# Altium PCB chargerShield.PcbDoc
Units mm, origin at the board's own origin, x right, y up, seen from the top; angles counter-clockwise.
Board outline 67.89 x 33.03 mm, 2 copper layers (Top Layer, Bottom Layer); 12 components, 9 nets, 73 pads, 9 vias.
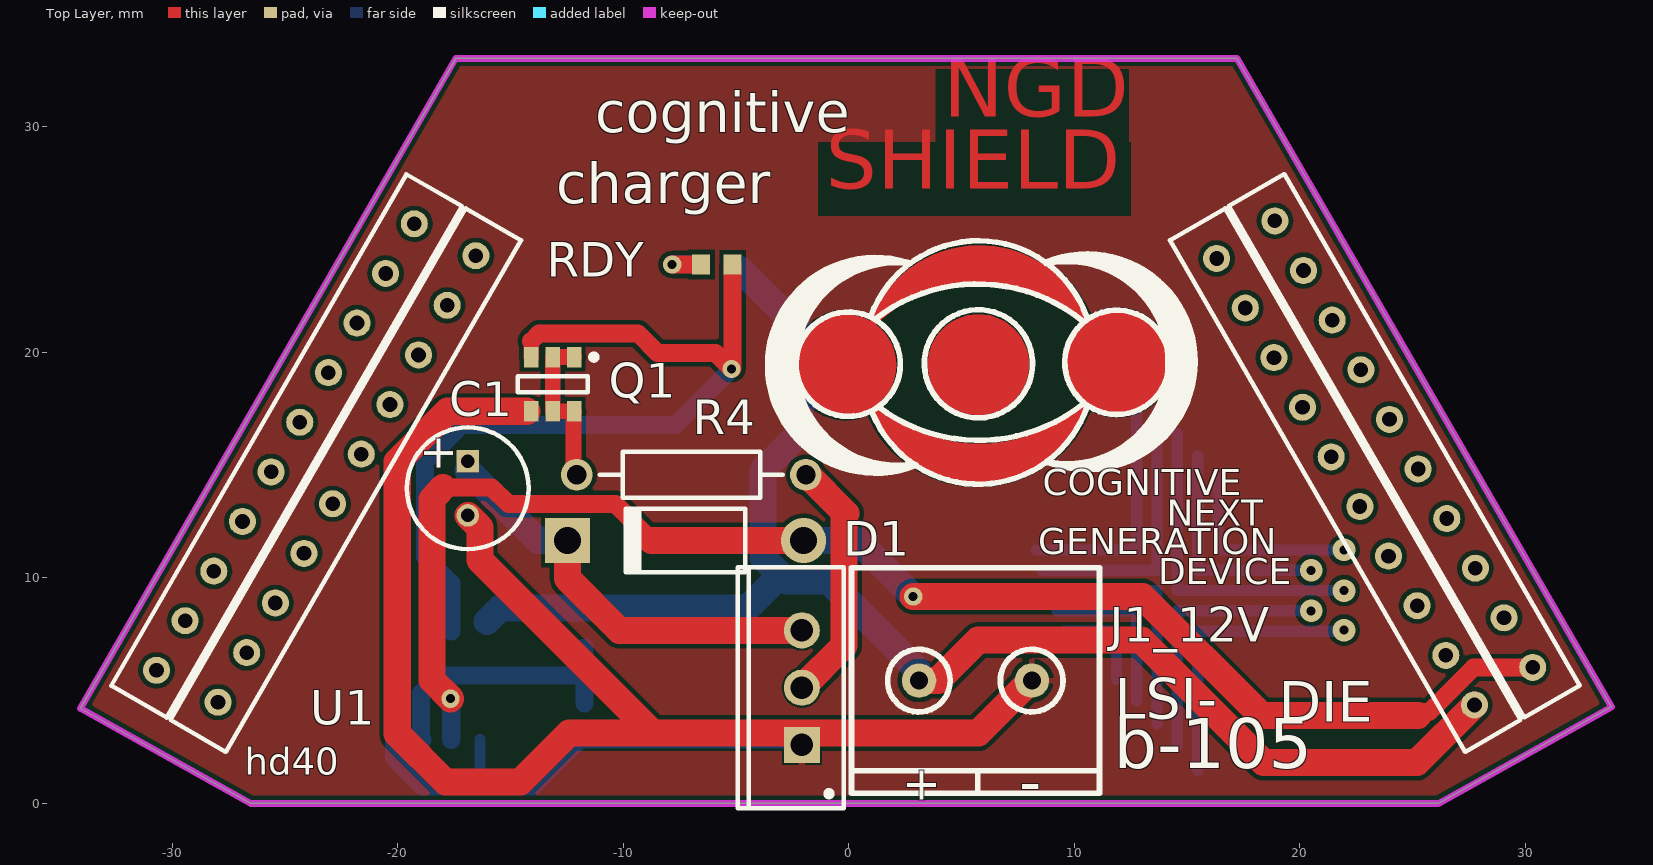
[diagram p0: Top Layer view]
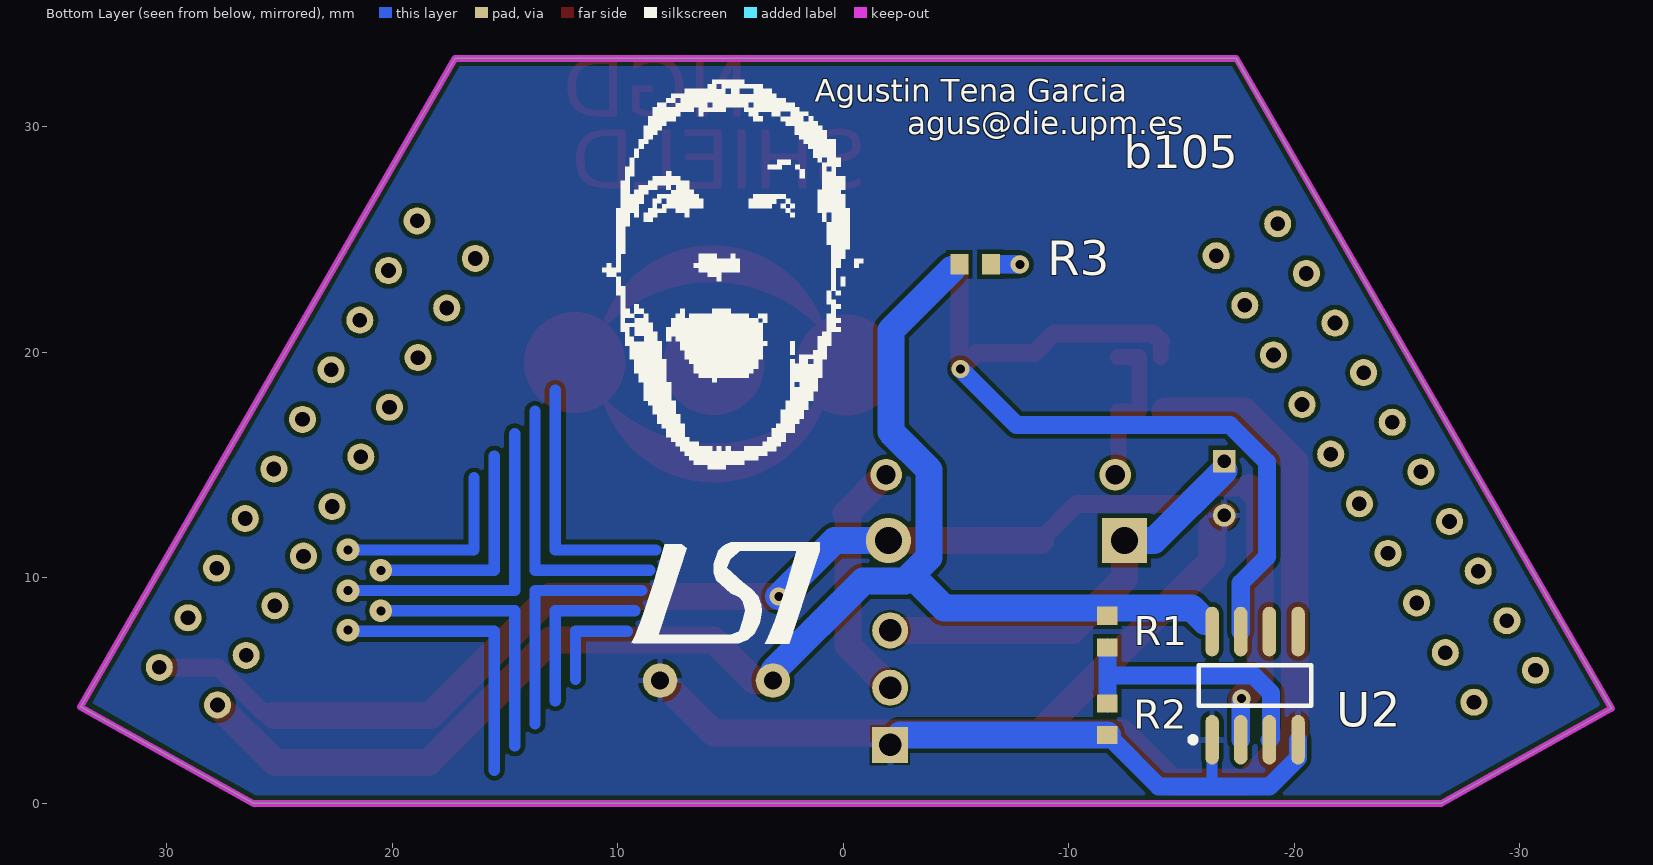
[diagram p1: Bottom Layer view, seen from below]

## Layer stack, top to bottom
Top Layer: signal copper 0.0356
Dielectric: dielectric 0.32, FR-4, Dk 4.8
Bottom Layer: signal copper 0.0356

## Board outline
-26.52,0 26.151,0 33.821,4.281 33.815,4.277 17.213,33.03 -17.427,33.03 -34.067,4.212 -34.056,4.206

## Design rules (kind name [scope] priority, off if disabled: settings)
Clearance pic_clearance [InComponent('U1')] p1: gap=0.1
Clearance [All] p2: gap=0.2
PolygonConnect [All] p1: connectstyle=Relief reliefconductorwidth=0.254 reliefentries=4 polygonreliefangle="90 Angle"
RoomDefinition chargerShield [InComponentClass('chargerShield')] p1 off: confinementstyle=ConfineIn formatcopy=TRUE lockcomponents=FALSE outline -169.867,-198.98 -119.067,-198.98 -119.067,-173.58 -169.867,-173.58
RoutingVias [All] p1: holewidth=0.4 width=0.8 viastyle="Through Hole" minholewidth=0 minwidth=0.6 maxholewidth=1 maxwidth=1.4
SilkscreenOverComponentPads [All] p1: minsilkscreentomaskgap=0.254
SolderMaskExpansion [All] p1: expansion=0.102
Width "VCC 5" [InNet('VCC5.0_POWER')] p1: maxlimit=2 minlimit=0.2 preferedwidth=1.2 minimp=50.000000 maximp=50.000000 favimp=50.000000
Width VCC [InNet('VCC')] p2: maxlimit=2 minlimit=0.2 preferedwidth=1.2
Width GND [InNet('GND')] p3: maxlimit=2 minlimit=0.2 preferedwidth=1.2 minimp=50.000000 maximp=50.000000 favimp=50.000000
Width [All] p4: maxlimit=2 minlimit=0.2 preferedwidth=1.2 minimp=50.000000 maximp=50.000000 favimp=50.000000
27 further rules are at their usual default settings.

## Components (designator, comment, footprint, x,y, rotation, side; value= is the part's Value field where it differs from the comment)
C1 "Cap Pol" Radial_pol_2.7 -16.89,13.97 r90 top
D1 "Diode 1N4007" DIO10.46-5.3X2.8 -7.233,11.654 r180 top
hd40 "header_cognitiveNGD_shield" HEADER_COGNITIVENGD_LONGLEGS -15.437,13.08 r0 top locked
J1_12V "Power 12v" "Conector ED-1631" 10.619,-0.055 r180 top (schematic designator J1)
Q1 "IRF5801" SOT23-6 -13.129,18.586 r270 top
R1 "resistor" 1608[0603] -11.71,7.62 r90 bottom
R2 "resistor" 1608[0603] -11.71,3.73 r90 bottom
R3 "resistor" 1608[0603] -5.847,23.905 r0 bottom
R4 "resistor" AXIAL-0.4 -6.981,14.568 r0 top (schematic designator R5)
RDY "LED_SMD_Hg" "0603[1608] pol" -5.847,23.895 r0 top (schematic designator LED_full)
U1 "LM317AMDT" TO-220AB -2.08,5.13 r90 top
U2 "LM311D" SOIC-8 -18.26,5.22 r90 bottom

## Footprints (in the part's own frame and the unit in brackets; to place one, negate y for a bottom-side part, rotate by r counter-clockwise, add the part's x,y. Pads: shape width x height; smd on the part's side, far side on the other; paste and mask are expansions set on the pad)
"0603[1608] pol" [mm]
  rect 0.8x0.9 smd: 1(-0.7,0) 2(0.7,0)
  body extent -0.8,-0.4 0.8,0.4, height 0.3
1608[0603] [mm] "Chip Capacitor, Body 1.6x0.8mm, IPC High Density"
  rect 0.8x0.9 smd: 1(-0.7,0) 2(0.7,0)
  body extent -0.8,-0.4 0.8,0.4, height 0.3
AXIAL-0.4 [mm] "Axial Device, Thru-Hole; 2 Leads; 0.4 in Pin Spacing"
  round 1.4 hole 0.85: 1(-5.08,0) 2(5.08,0)
  silkscreen extent -4.06,-1.02 4.06,1.02, body extent -5.06,-1.28 5.02,1.26, height 2.54
"Conector ED-1631" [mm]
  round 1.524 hole 0.8: 1(2.5,-5.5) 2(7.5,-5.5)
  silkscreen extent -0.5,-10.5 10.5,-0.5, body extent -0.02,-10.1 9.98,-2.1, height 10
DIO10.46-5.3X2.8 [mm] "Diode, Axial; Body 5.2 x 2.7 mm (LxDia. max), Lead Dia. 0.86 mm (max)"
  round 2 hole 1.2: 1(-5.23,0)
  rect 2x2 hole 1.2: 2(5.23,0)
  silkscreen extent -2.65,-1.4 2.75,1.4, body extent -5.34,-1.02 5.37,1, height 2.21
HEADER_COGNITIVENGD_LONGLEGS [mm]
  round 1.2 / inner oval 2.5x1.2 / far side round 1.2 hole 0.65: 00(-3.826,12.617) 01(-5.096,10.417) 02(-6.366,8.217) 03(-7.636,6.018) 04(-8.906,3.818) 05(-10.176,1.618) 06(-11.446,-0.581) 07(-12.716,-2.781) 08(-13.986,-4.981) 09(-15.256,-7.181) 10(-12.527,-8.594) 11(-11.257,-6.395) 12(-9.987,-4.195) 13(-8.717,-1.995) 14(-7.447,0.204) 15(-6.177,2.404) 16(-4.907,4.604) 17(-3.637,6.804) 18(-2.367,9.003) 19(-1.097,11.203) 20(31.747,11.082) 21(33.017,8.882) 22(34.287,6.682) 23(35.557,4.483) 24(36.827,2.283) 25(38.097,0.083) 26(39.367,-2.116) 27(40.637,-4.316) 28(41.907,-6.516) 29(43.177,-8.716) 30(45.761,-7.051) 31(44.491,-4.851) 32(43.221,-2.651) 33(41.951,-0.452) 34(40.681,1.748) 35(39.411,3.948) 36(38.141,6.148) 37(36.871,8.347) 38(35.601,10.547) 39(34.331,12.747)
  silkscreen extent -17.26,-10.79 47.84,14.82, body extent -16.97,-10.43 47.5,14.46, height 7
Radial_pol_2.7 [mm] "Polarized Capacitor (Radial); 2 Leads"
  rect 1x1 hole 0.6: 1(1.2,0)
  round 1 hole 0.6: 2(-1.2,0)
  silkscreen extent -2.7,-2.7 2.7,2.7, body extent -2.79,-2.54 2.79,2.54, height 12.8
SOIC-8 [mm] "SOIC, 8-Leads, Body 4.9x3.9mm, Pitch 1.27mm, IPC Medium Density"
  oval 2.2x0.6 smd: 1(-2.4,1.905) 2(-2.4,0.635) 3(-2.4,-0.635) 4(-2.4,-1.905) 5(2.4,-1.905) 6(2.4,-0.635) 7(2.4,0.635) 8(2.4,1.905)
  silkscreen extent -2.52,-2.5 0.9,2.88, body extent -3.01,-2.5 3.01,2.5, height 1.75
SOT23-6 [mm] "SOT23, 6-Leads, Body 2.9x1.6mm, Pitch 0.95mm, Lead Span 2.8mm, IPC High Density"
  rect 0.9x0.65 smd: 1(-1.2,0.95) 2(-1.2,0) 3(-1.2,-0.95) 4(1.2,-0.95) 5(1.2,0) 6(1.2,0.95)
  silkscreen extent -1.32,-1.55 0.35,1.95, body extent -1.5,-1.55 1.5,1.55, height 1.45
TO-220AB [mm] "TO, Thru-Hole, Vertical, Heatsink Mounted; 3 In-Line Leads; Pitch 2.54 mm"
  rect 1.6x1.6 hole 1: 1(-2.54,0)
  round 1.6 hole 1: 2(0,0) 3(2.54,0)
  silkscreen extent -5.35,-1.85 5.35,2.85, body extent -5.1,-0.37 5.06,19.13, height 2

## Part data
C1: "Polarized Capacitor (Surface Mount)"
D1: "1 Amp General Purpose Rectifier"
hd40: library part header_cognitiveNGD
J1_12V: library part "Conector ED-1631", "Terminal Block 2 vías, 5mm"
Q1: "HEXFET Power MOSFET"
R1 R2 R3 R4: library part RES, "Resistor"
RDY: "Typical BLUE SiC LED"
U1: "3-Terminal Adjustable Regulator"
U2: "High-Performance Voltage Comparator"

## Via types
v1: diameter 1, hole 0.4, Top Layer to Bottom Layer, 5 vias
v2: diameter 0.8, hole 0.4, Top Layer to Bottom Layer, 4 vias

## Nets (pads, with @x,y where several pads share a name; then routed paths per layer and width w, separated by ;. In a path a pad name is that pad's centre, name@x,y a point inside that pad or via, vN(x,y) a via of type N, cw(c..) or ccw(c..) an arc to the next point about the centre after c; other vN are vias at no path point)
GND: C1.2 J1_12V.1 Q1.4 R2.1 U1.1 U2.1 U2.4 | length 85.2
  Top Layer w1.2: C1.2 -16.36,12.24 -16.36,10.79 -8.69,3.12 ; Q1.4@-14.279,17.386 -17.781,17.386 -20.02,15.147 -20.02,3.088 -17.882,0.95 -14.563,0.95 -12.393,3.12 -8.69,3.12 ; J1_12V.1@8.07,5.45 5.74,3.12 -8.69,3.12
  Bottom Layer w0.5: U2.1 -16.355,0.778 -16.327,0.75
  Bottom Layer w0.8: U2.4 -20.165,2.017 -18.898,0.75 -16.327,0.75 -13.99,0.75 R2.1
  Bottom Layer w1.2: R2.1 -2.52,3.03 U1.1
NetC1_1: C1.1 D1.2 U1.3 | length 18.7
  Top Layer w1.2: D1.2 -12.463,9.964 -10.169,7.67 U1.3
  Bottom Layer w1.2: C1.1@-16.89,14.762 -13.782,11.654 D1.2
NetD1_1: D1.1 hd40.30 U2.2 | length 64.9
  Top Layer w0.8: -17.992,14.008 -15.834,14.008 -15.094,13.268 -10.351,13.268 -8.737,11.654 ; 25.386,4.057 25.736,4.057 27.708,6.029 hd40.30
  Top Layer w1.2: -17.992,14.008 -18.476,13.48 -18.476,5.466 v2(-17.65,4.64) ; -8.737,11.654 D1.1 ; v2(2.858,9.177) 13.014,9.177 18.286,3.905 25.234,3.905
  Bottom Layer w0.8: v2(-17.65,4.64) -17.625,4.615 U2.2
  Bottom Layer w1.2: D1.1 0.381,11.654 v2(2.858,9.177)
NetLED_full_1: R3.1 RDY.1 | length 2.6
  Top Layer w0.8: v2(-7.827,23.895) RDY.1
  Bottom Layer w0.8: v2(-7.827,23.895) -7.817,23.905 R3.1
NetLED_full_2: Q1.3 RDY.2 U2.7 | length 38.3
  Top Layer w0.7: Q1.3 -14.079,20.492
  Top Layer w0.8: -14.079,20.492 -13.735,20.836 -9.336,20.836 -8.472,19.972 -5.912,19.972 v2(-5.2,19.26) ; v2@-5.147,19.278 RDY.2
  Bottom Layer w0.8: U2.7 -17.625,9.773 -18.78,10.928 -18.78,15.129 -17.139,16.77 -7.69,16.77 v2(-5.2,19.26)
NetQ1_1: Q1.1 Q1.2 Q1.5 Q1.6 R4.1 | length 7.2
  Top Layer w0.7: Q1.6@-12.208,17.386 -12.208,15.095 -12.061,14.948 R4.1 ; Q1.6 Q1.5 -13.129,18.663 Q1.2 Q1.1
NetR1_1: R1.1 R2.2 U2.3 | length 12.2
  Bottom Layer w0.8: U2.3 -18.97,2.895 -18.97,4.9 -18.195,5.675 -11.71,5.675 ; R2.2 -11.71,5.675 ; R1.1 -11.71,5.675
NetR5_2: R4.2 U1.2 | length 11
  Top Layer w1.2: U1.2 -0.208,7.002 -0.208,10.903 -0.203,10.908 -0.203,12.762 -0.12,12.845 -1.843,14.568 R4.2
VCC: hd40.29 J1_12V.2 R1.2 R3.2 U2.8 | length 66.1
  Top Layer w1.2: J1_12V.2@3.07,5.45 3.95,5.45 5.74,7.24 12.97,7.24 18.4,1.81 25.186,1.81 hd40.29
  Bottom Layer w1.2: -16.045,8.065 -15.441,8.669 -4.471,8.669 -3.336,9.804 ; R3.2@-4.81,23.67 -2.111,20.97 -2.111,16.479 -3.803,14.787 -3.803,10.908 -2.749,9.854 -0.884,9.854 3.07,5.9 J1_12V.2@3.07,5.45
pads on no net: hd40.00 hd40.01 hd40.02 hd40.03 hd40.04 hd40.05 hd40.06 hd40.07 hd40.08 hd40.09 hd40.10 hd40.11 hd40.12 hd40.13 hd40.14 hd40.15 hd40.16 hd40.17 hd40.18 hd40.19 hd40.20 hd40.21 hd40.22 hd40.23 hd40.24 hd40.25 hd40.26 hd40.27 hd40.28 hd40.31 hd40.32 hd40.33 hd40.34 hd40.35 hd40.36 hd40.37 hd40.38 hd40.39 U2.5 U2.6
copper on no net: | length 150.8
  Top Layer w0.2: -23.073,19.098 -23.073,19.324 ; -20.533,23.497 -20.08,23.497 ; -19.263,25.697 -19.08,25.88 ; 24.777,8.764 25.201,8.764 ; 27.784,10.161 27.784,10.429
  Top Layer w0.254: 1.044,21.278 cw(c5.79,19.569) 10.468,21.459 ; 1.053,17.51 ccw(c5.73,19.399) 10.477,17.69 ; 1.059,21.264 cw(c5.82,16.499) 10.426,21.415 ; 1.195,17.634 ccw(c5.8,22.549) 10.562,17.785
  Bottom Layer w0.5: 8.317,11.235 12.767,11.235 12.767,18.323 ; 8.577,10.333 13.667,10.333 13.667,17.383 ; 8.927,9.436 13.667,9.436 13.667,3.533 ; 9.237,8.536 12.767,8.536 12.767,4.543 ; 9.577,7.636 11.867,7.636 11.867,5.503 ; 14.567,2.543 14.567,8.535 v1(20.497,8.535) ; 14.567,16.393 14.567,9.436 v1(21.957,9.436) ; 15.467,1.473 15.467,7.636 v1@21.957,7.636 ; 15.467,15.403 15.467,10.336 v1(20.497,10.336) ; 16.367,14.433 16.367,11.236 v1(21.957,11.236)
  other v1: 21.957,7.683

## Polygon pours and split planes (outlines as drawn)
GND on Bottom Layer "Bottom Layer-No Net" (solid, remove dead copper, pour order 9): -41.735,40.449 -41.735,-12.89 -40.99,-13.635 41.402,-13.635 44.68,-10.357 43.041,-8.718 43.041,39.853
GND on Top Layer "Bottom Layer-No Net" (solid, remove dead copper, pour order 11): -45.147,40.955 -41.869,37.677 -41.869,-10.015 37.945,-10.015 41.059,-6.901 41.059,35.874 44.337,39.152

## Keep-outs
Keep-Out Layer:
  lines w0.3: -34.067,4.212 -17.427,33.03 17.213,33.03 33.815,4.277 ; -34.056,4.206 -26.52,0 26.151,0 33.821,4.281

## Other copper
Top Layer:
  region: 0.935,17.462 ccw(c5.73,19.399) 10.592,17.635 ccw(c5.8,22.549) 10.652,17.695 ccw(c10.562,17.785) 10.69,17.785 ccw(c10.562,17.785) 10.472,17.875 cw(c5.8,22.549) 1.282,17.727 ccw(c1.195,17.634) 1.067,17.636 ccw(c1.053,17.51)
  region: 0.962,21.181 ccw(c1.059,21.264) 1.149,21.174 cw(c5.82,16.499) 10.339,21.322 ccw(c10.426,21.415) 10.537,21.352 ccw(c10.468,21.459) 10.595,21.459 ccw(c10.468,21.459) 10.586,21.506 ccw(c5.79,19.569) 0.924,21.321 ccw(c1.044,21.278)
  region: 11.906,17.305 cw(c11.906,19.545) 9.666,19.545 cw(c11.906,19.545) 11.906,21.785 cw(c11.906,19.545) 14.146,19.545 cw(c11.906,19.545)
  region: 5.75,17.209 cw(c5.75,19.449) 3.51,19.449 cw(c5.75,19.449) 5.75,21.689 cw(c5.75,19.449) 7.99,19.449 cw(c5.75,19.449)
  region: -0.14,17.189 cw(c-0.14,19.429) -2.38,19.429 cw(c-0.14,19.429) -0.14,21.669 cw(c-0.14,19.429) 2.1,19.429 cw(c-0.14,19.429)
  text "NGD" at 4.183,29.59 h4.5
  text "SHIELD" at -1.017,26.39 h4.5

## Silkscreen, mask and mechanical layers (free items; w line width, h text height)
Top Overlay:
  region: 8.774,14.999 cw(c8.799,15.124) 8.696,15.2 cw(c8.811,15.144) 8.858,15.263 ccw(c10.568,19.583) 8.955,15.225 ccw(c9.669,19.541) 14.043,19.541 ccw(c9.669,19.541) 8.78,23.824 cw(c8.754,23.949) 8.63,23.922 cw(c8.737,23.991) 8.688,24.109 cw(c10.568,19.583) 15.469,19.583 cw(c10.568,19.583) 8.89,14.978 cw(c9.669,19.541)
  region: 2.855,15.167 cw(c2.139,19.483) 2.71,23.819 ccw(c2.726,23.946) 2.854,23.946 ccw(c2.726,23.946) 2.743,24.072 ccw(c2.139,19.483) 2.683,24.079 ccw(c2.6,23.982) 2.638,24.104 ccw(c1.188,19.423) 3.022,14.878 ccw(c2.975,14.996) 3.102,14.996 ccw(c2.975,14.996) 2.974,15.123 ccw(c2.876,15.042)
  lines w0.025: -5.23,18.94 -5.21,18.92 -5.21,18.926
  lines w0.254: 0.986,21.629 cw(c5.757,19.855) 10.547,21.578 ; 1.059,17.278 ccw(c5.754,19.242) 10.575,17.609 ; 1.163,21.468 cw(c5.714,15.612) 10.395,21.366 ; 1.319,17.575 ccw(c5.764,23.512) 10.316,17.656 ; 2.284,19.592 ccw(c-0.026,19.473) 2.287,19.489 ; 2.6,23.982 ccw(c1.188,19.423) 2.975,14.996 ; 2.726,23.946 ccw(c2.139,19.483) 2.876,15.042 ; 8.144,19.612 ccw(c5.75,19.49) 8.147,19.509 ; 8.737,23.991 cw(c10.568,19.583) 8.811,15.144 ; 8.754,23.949 cw(c9.669,19.541) 8.799,15.124 ; 14.204,19.672 ccw(c11.894,19.553) 14.207,19.569
  text "cognitive" at -11.237,29.75 h1.8
  text "charger" at -12.97,26.61 h1.8
  text "COGNITIVE" at 8.606,13.274 h2
  text "NEXT" at 14.108,11.907 h2
  text "GENERATION" at 8.396,10.646 h2
  text "DEVICE" at 13.722,9.314 h2
  text "LSI-" at 11.8,3.76 h1.8
  text "DIE" at 19.07,3.63 h1.8
  text "b-105" at 11.74,0.82 h3.8
  text "+" at 2.382,0.157 h1.5
  text "-" at 7.561,-0.015 h2
Bottom Overlay:
  drawing of 47 lines, arcs and shapes, not listed
  text "Agustin Tena Garcia" at 1.27,31.1 h1
  text "agus@die.upm.es" at -2.84,29.67 h1
  text "b105" at -12.43,27.67 h2.5
Top Solder:
  region: 0.941,21.236 ccw(c1.038,21.318) 1.128,21.228 cw(c5.8,16.554) 10.319,21.376 ccw(c10.406,21.469) 10.517,21.406 ccw(c10.447,21.513) 10.575,21.513 ccw(c10.447,21.513) 10.566,21.561 ccw(c5.77,19.624) 0.904,21.376 ccw(c1.024,21.332)
  region: -0.16,17.244 cw(c-0.16,19.484) -2.4,19.484 cw(c-0.16,19.484) -0.16,21.724 cw(c-0.16,19.484) 2.08,19.484 cw(c-0.16,19.484)
  region: 5.73,17.264 cw(c5.73,19.504) 3.49,19.504 cw(c5.73,19.504) 5.73,21.744 cw(c5.73,19.504) 7.97,19.504 cw(c5.73,19.504)
  region: 11.886,17.359 cw(c11.886,19.599) 9.646,19.599 cw(c11.886,19.599) 11.886,21.839 cw(c11.886,19.599) 14.126,19.599 cw(c11.886,19.599)
  region: 0.915,17.516 ccw(c5.71,19.454) 10.572,17.69 ccw(c5.78,22.604) 10.632,17.749 ccw(c10.542,17.839) 10.669,17.839 ccw(c10.542,17.839) 10.452,17.929 cw(c5.78,22.604) 1.261,17.781 ccw(c1.174,17.688) 1.047,17.691 ccw(c1.033,17.564)
  lines w0.254: 1.024,21.332 cw(c5.77,19.624) 10.447,21.513 ; 1.033,17.564 ccw(c5.71,19.454) 10.456,17.745 ; 1.038,21.318 cw(c5.8,16.554) 10.406,21.469 ; 1.174,17.688 ccw(c5.78,22.604) 10.542,17.839
  text "NGD" at 4.183,29.59 h4.5
  text "SHIELD" at -1.017,26.39 h4.5
Bottom Solder:
  lines w0.5: 8.317,11.235 12.767,11.235 12.767,18.323 ; 8.577,10.333 13.667,10.333 13.667,17.383 ; 8.927,9.436 13.667,9.436 13.667,3.533 ; 9.237,8.536 12.767,8.536 12.767,4.543 ; 9.577,7.636 11.867,7.636 11.867,5.503 ; 14.567,2.543 14.567,8.535 20.497,8.535 ; 14.567,16.393 14.567,9.436 21.957,9.436 ; 15.467,1.473 15.467,7.636 21.957,7.636 ; 15.467,15.403 15.467,10.336 20.497,10.336 ; 16.367,14.433 16.367,11.236 21.957,11.236

## Text inside footprints (layer, text, board x,y; h text height)
C1: Top Overlay "+" at -17.54,14.67 h1.5 r90